# Altium PCB PCB5.PcbDoc
Units mil, origin at the board's own origin, x right, y up, seen from the top; angles counter-clockwise.
Board outline 1968.58 x 1968.74 mil, 4 copper layers (Top Layer, MidLayer1, MidLayer2, Bottom Layer); 65 components, 46 nets, 325 pads, 46 vias.
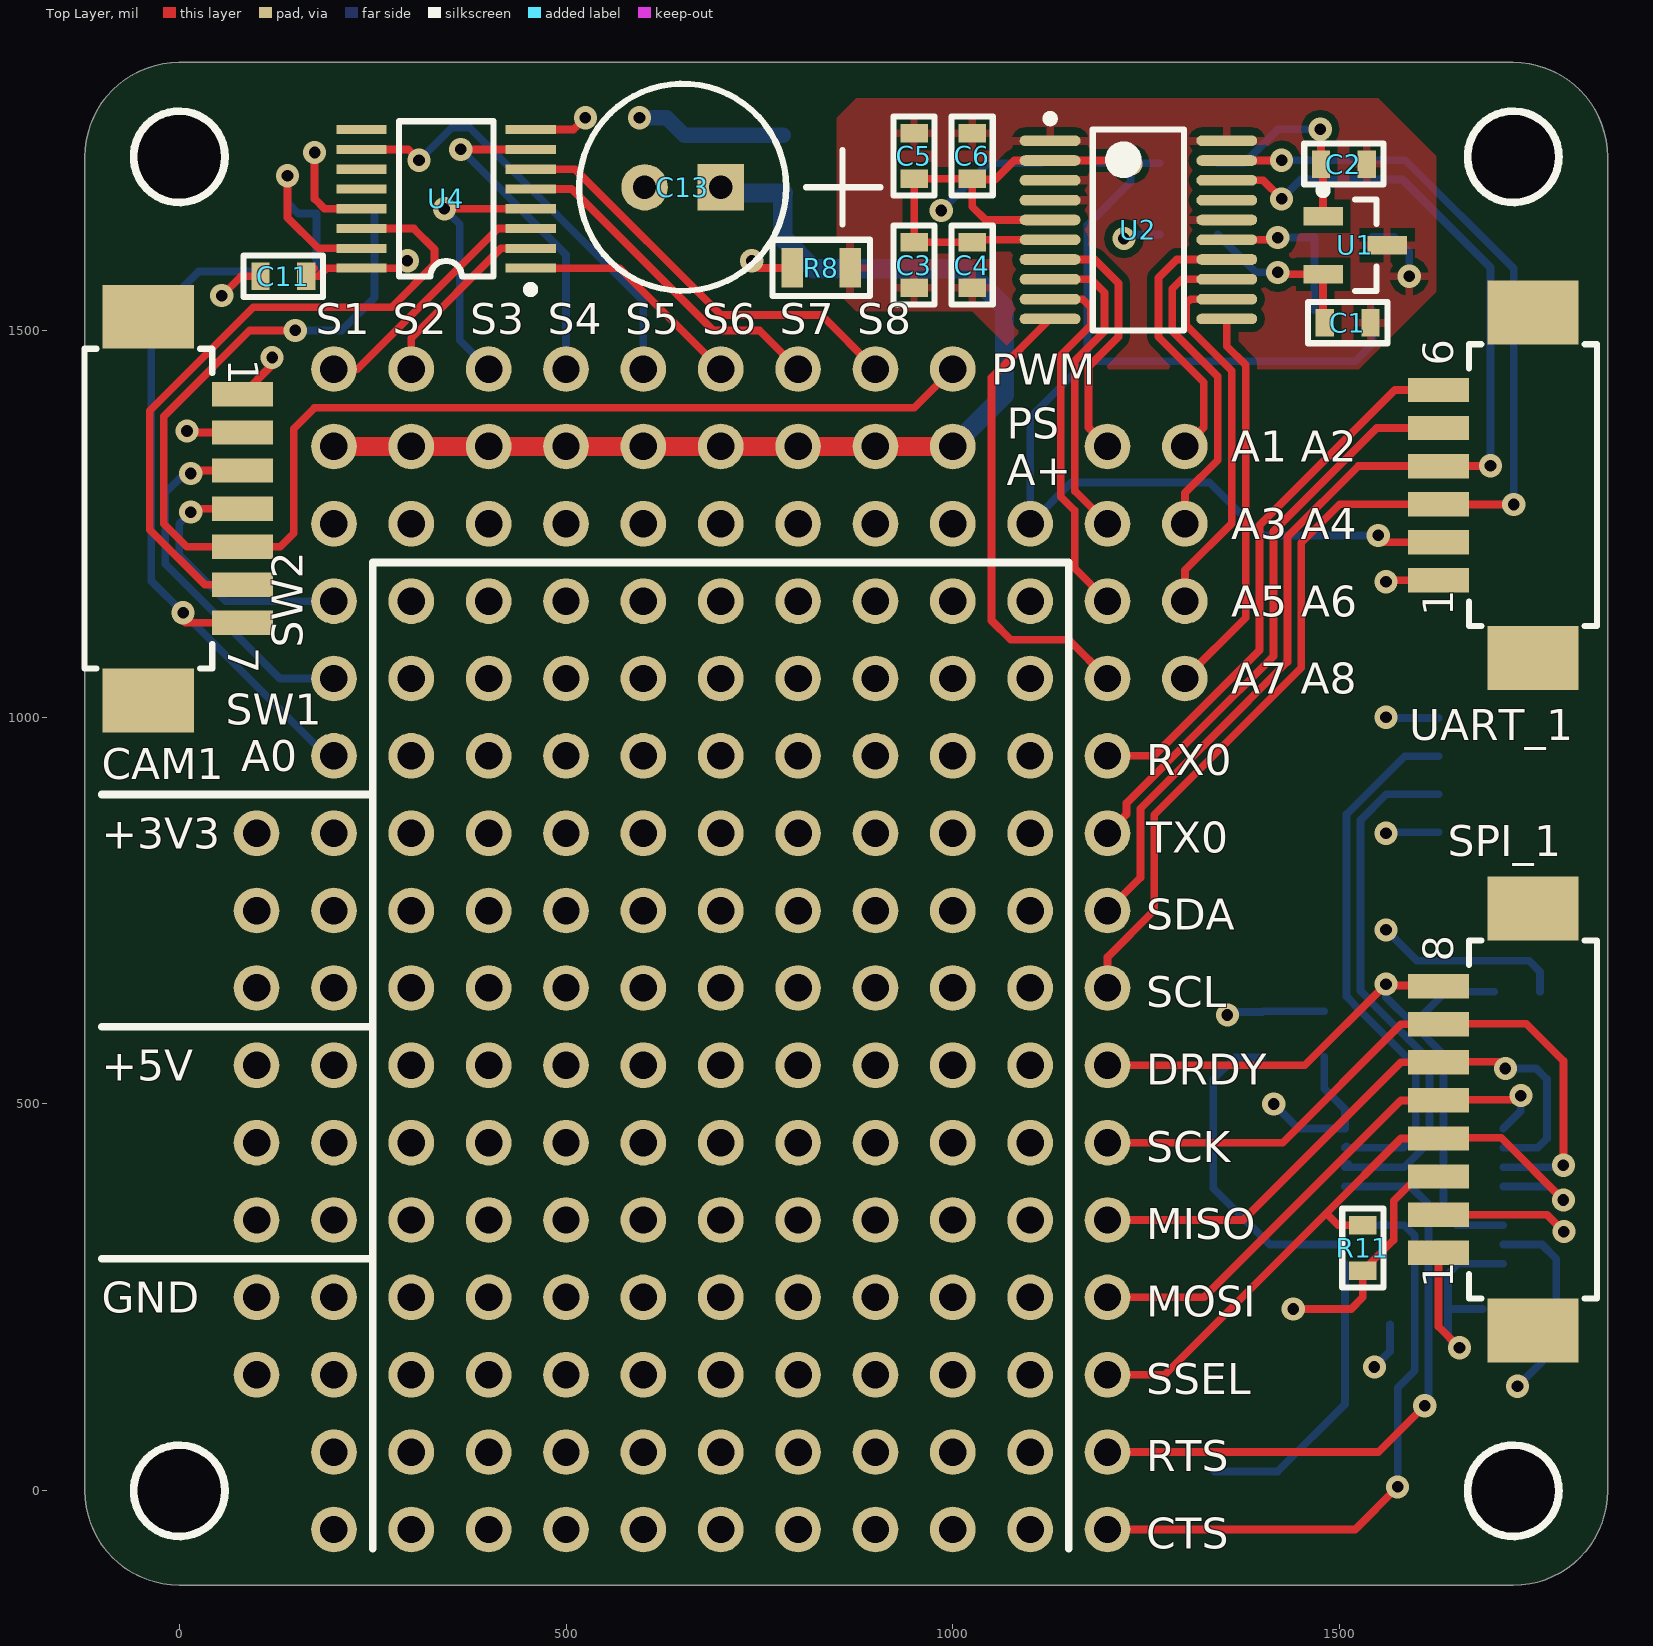
[diagram p0: Top Layer view]
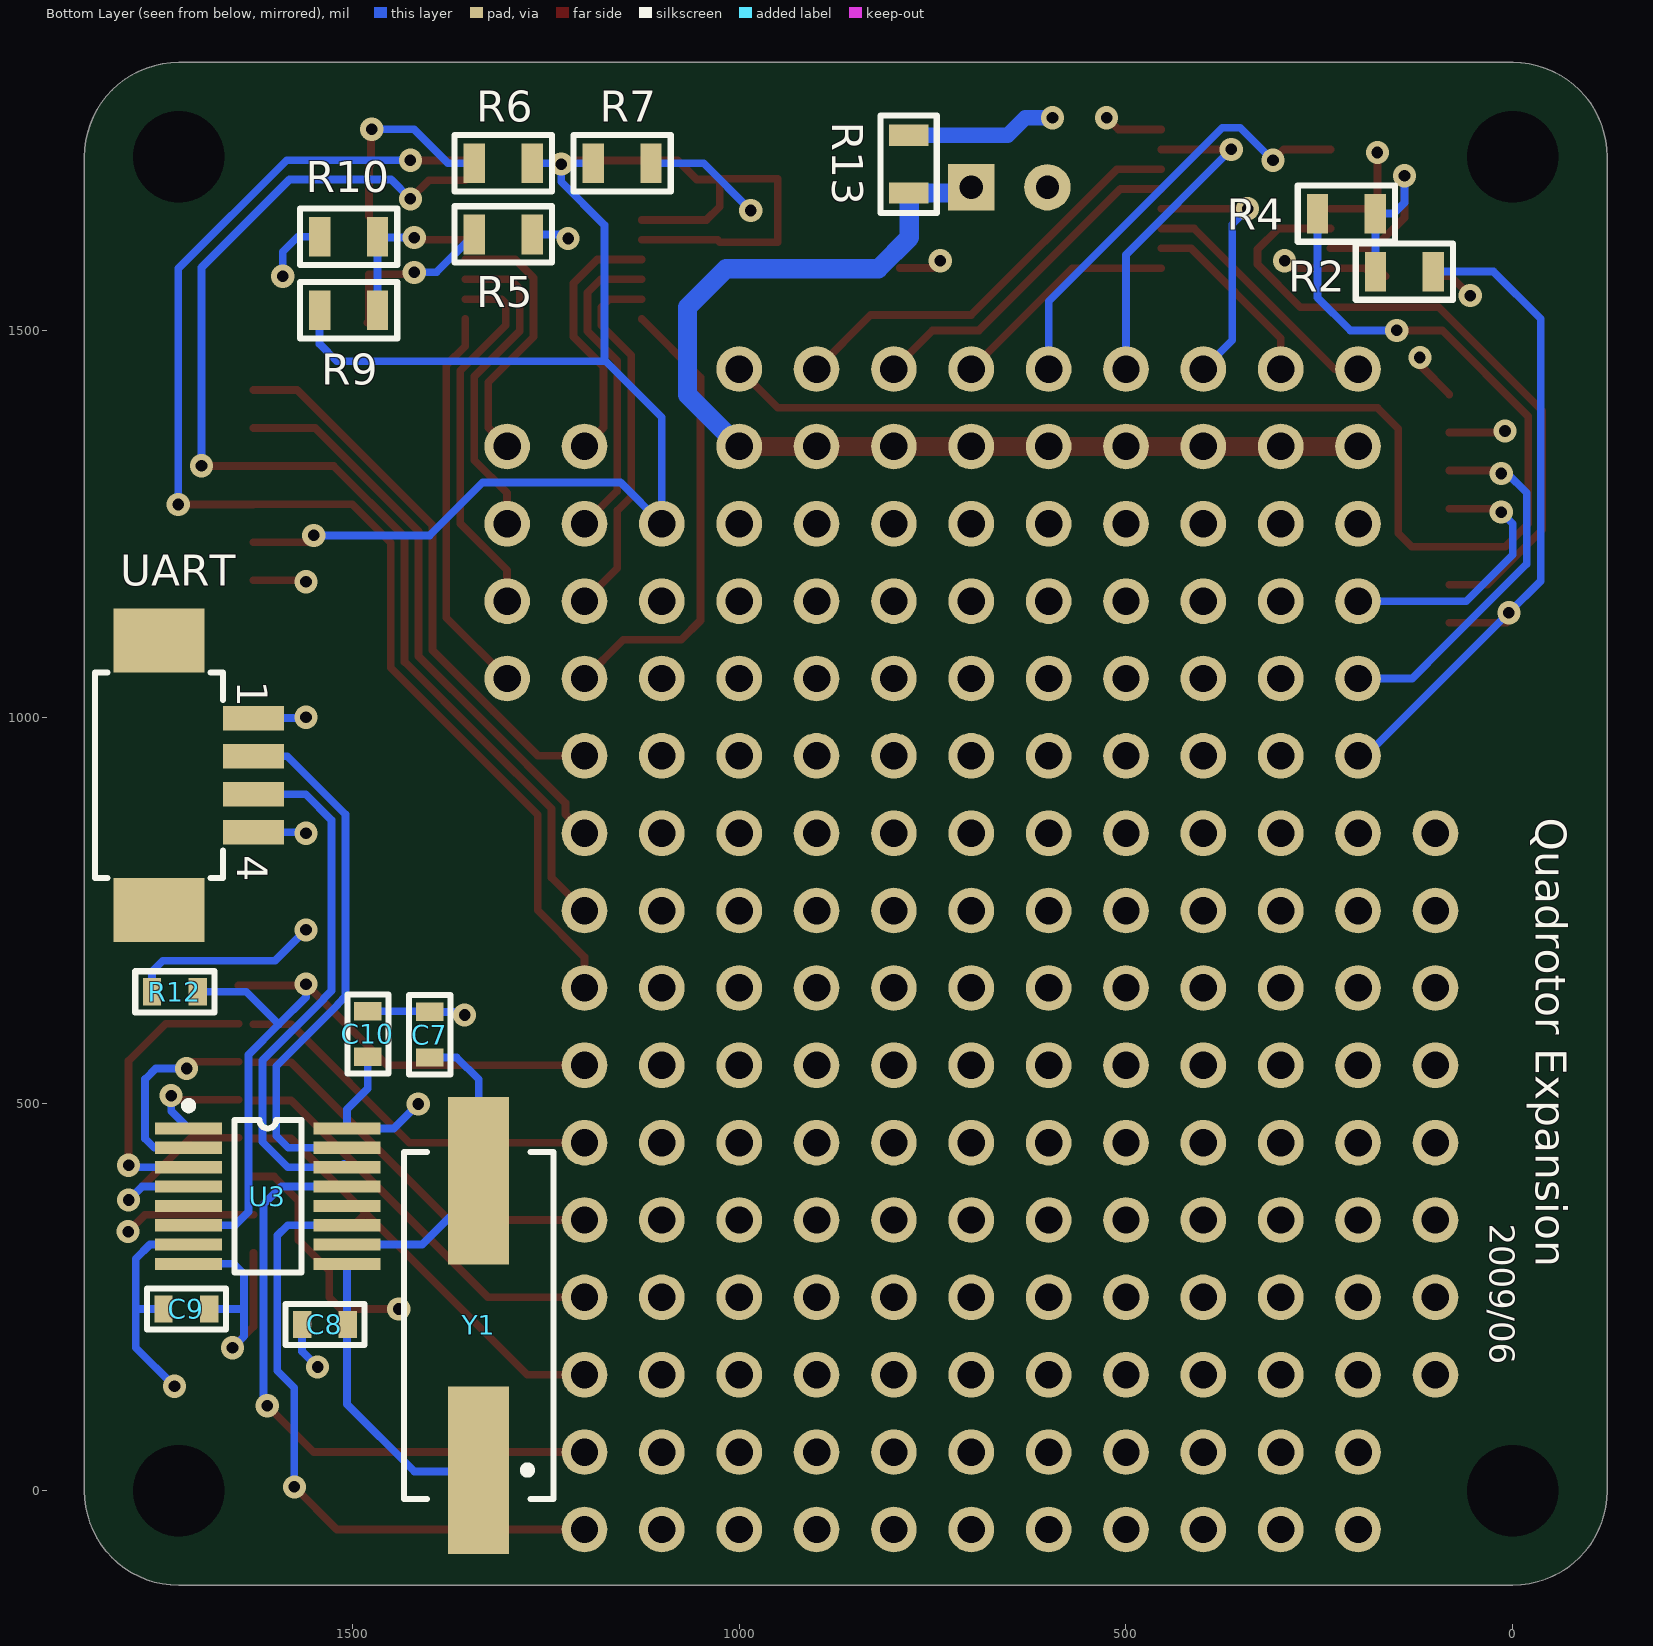
[diagram p1: Bottom Layer view, seen from below]
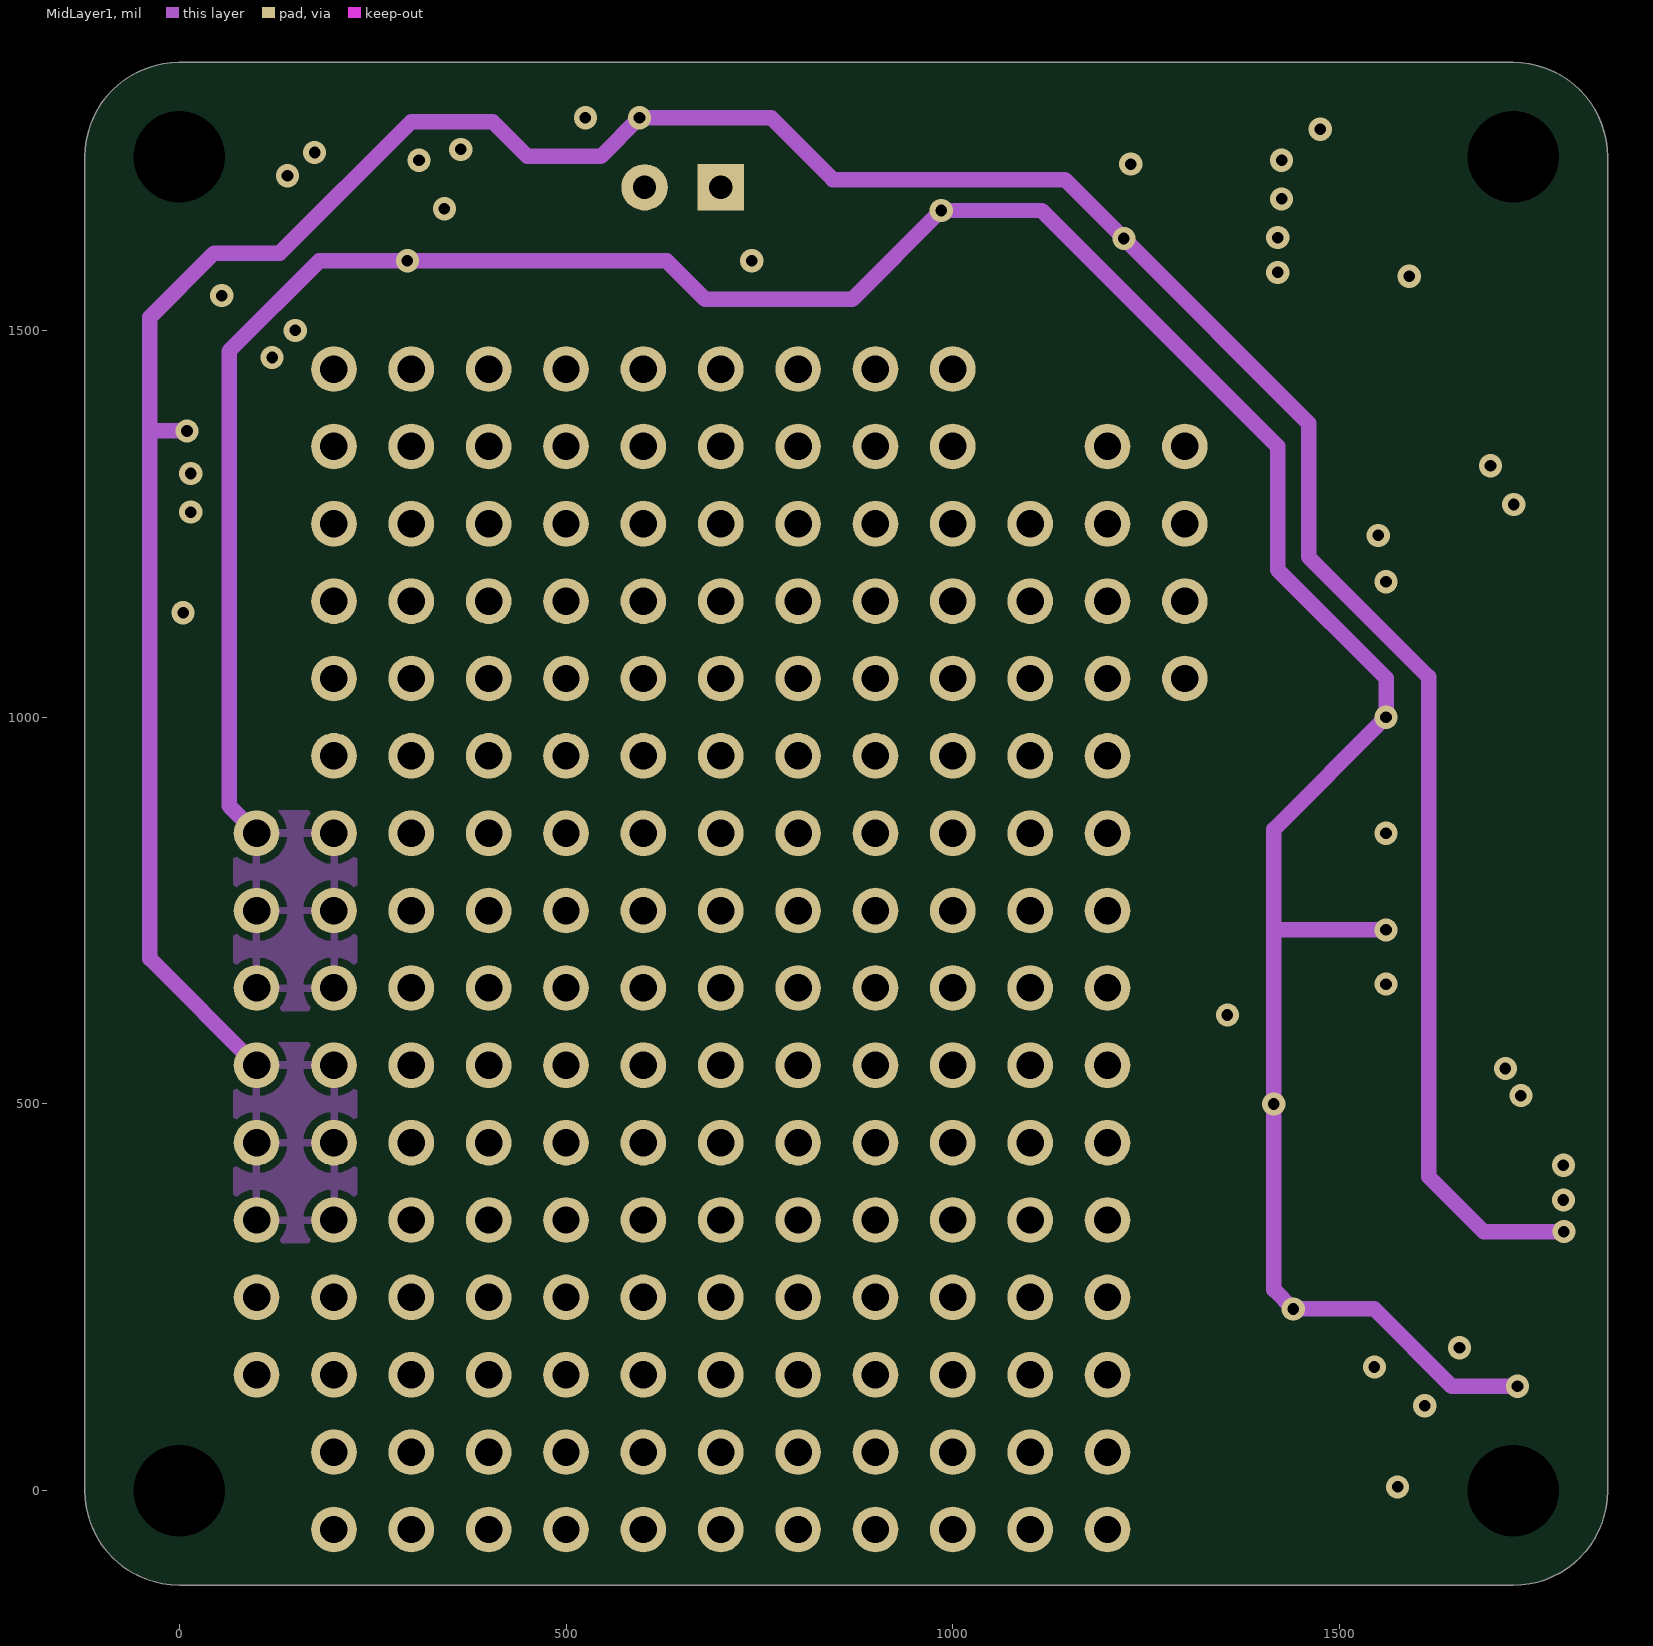
[diagram p2: MidLayer1]
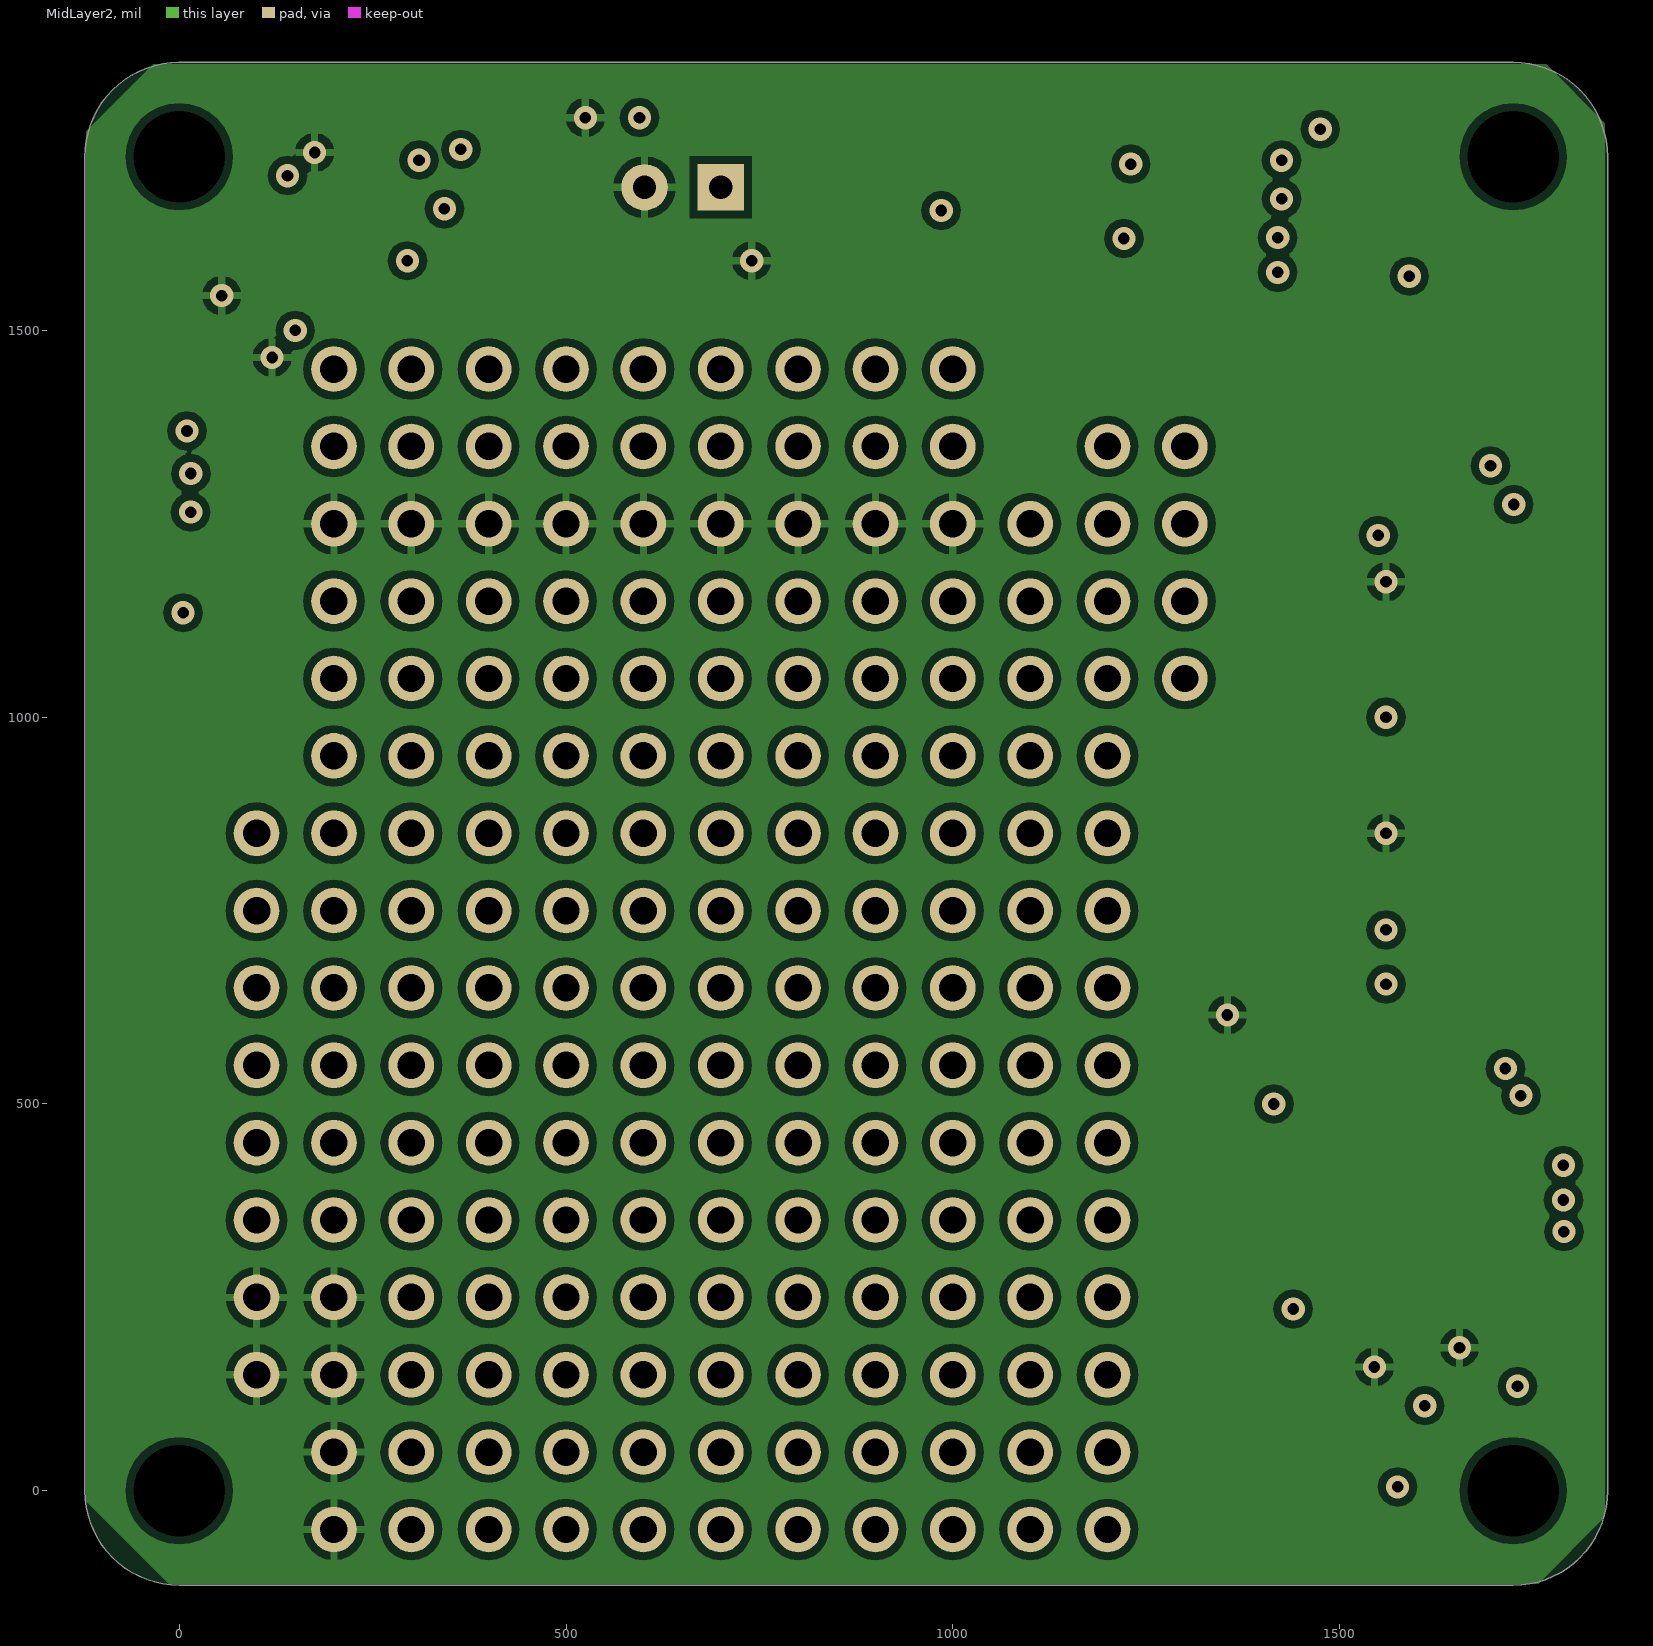
[diagram p3: MidLayer2]

## Layer stack, top to bottom
Top Layer: signal copper 1.4
Dielectric: core 12.6, FR-4, Dk 4.8
MidLayer1: signal copper 1.4
Dielectric: prepreg 12.6, FR-4, Dk 4.8
MidLayer2: signal copper 1.4
Dielectric: core 12.6, FR-4, Dk 4.8
Bottom Layer: signal copper 1.4

## Board outline
-122.05,0 ccw(c0,0) 0,-122.05 0.08,-121.97 1724.41,-121.97 1724.49,-122.2 ccw(c1724.41,-0.08) 1846.54,0 1846.54,1724.33 1846.46,1724.41 ccw(c1724.41,1724.41) 1724.41,1846.46 1724.41,1846.54 0.08,1846.54 0,1846.46 ccw(c0,1724.41) -122.05,1724.41

## Design rules (kind name [scope] priority, off if disabled: settings)
Clearance Clearance_2 [OnLayer(MidLayer1) vs (IsTrack)] p1: gap=20
Clearance Clearance_1 [InPoly] p2: gap=10
Clearance [All] p3: gap=8
ComponentClearance [All] p1 off: gap=10 collisioncheckmode=3 verticalgap=0 showdistances=TRUE
Height [All] p1: minheight=0 maxheight=10000 prefheight=500
HoleSize [All] p1: absolutevalues=TRUE maxlimit=196.85 minlimit=0.98 maxpercent=80.000 minpercent=20.000
MinimumSolderMaskSliver [All] p1 off: minsoldermaskwidth=10
PolygonConnect [All] p1: connectstyle=Relief reliefconductorwidth=10 reliefentries=4 polygonreliefangle="90 Angle"
RoutingVias [All] p1: holewidth=15 width=30 viastyle="Through Hole" minholewidth=15 minwidth=30 maxholewidth=30 maxwidth=50
SilkToSilkClearance [All] p1 off: silktosilkclearance=10
SilkscreenOverComponentPads [All] p1 off: minsilkscreentomaskgap=10
SolderMaskExpansion SolderMaskExpansion_1 [(IsVia)] p1: expansion=0
SolderMaskExpansion [Not (IsVia)] p2: expansion=4.02
TestPointUsage [All] p1: valid=0 allowmultiple=FALSE
Testpoint [All] p1: side=15 testpointundercomponent=TRUE minsize=40 maxsize=100 preferedsize=60 minholesize=0 maxholesize=40 preferedholesize=32 testpointgrid=1 style=1023 order=0-112345678
Width [All] p1: maxlimit=200 minlimit=6 preferedwidth=10 midlayer1_maxwidth=20 midlayer2_maxwidth=20 minimp=50.000000 maximp=50.000000 favimp=50.000000
18 further rules are at their usual default settings.

## Classes and differential pairs
component class ADC: A1 A2 A3 A4 A5 A6 A7 A8 A+ C1 C2 C3 C4 C5 C6 P7 P8 P9 P10 P11 P12 P13 P14 R5 R6 R7 R8 R9 R10 U1 U2
component class UART: C7 C8 C9 C10 CTS P15 R11 R12 RTS U3 UART Y1
component class SERVO: C11 C13 PS R13 S1 S2 S3 S4 S5 S6 S7 S8 U4
component class ExpansionMain: A0 CAM CAM1 DRDY MISO MOSI P1 P2 P3 PWM R2 R4 RX0 SCK SCL SDA SPI_0 SPI_1 SSEL SW1 SW2 TX0 UART_0 UART_1

## Components (designator, comment, footprint, x,y, rotation, side; value= is the part's Value field where it differs from the comment)
A0 "" PAD_ROUND 200,950 r0 top
A1 "" PAD_ROUND 1200,1350 r90 top
A2 "" PAD_ROUND 1300,1350 r90 top
A3 "" PAD_ROUND 1200,1250 r90 top
A4 "" PAD_ROUND 1300,1250 r0 top
A5 "" PAD_ROUND 1200,1150 r90 top
A6 "" PAD_ROUND 1300,1150 r0 top
A7 "" PAD_ROUND 1200,1050 r0 top
A8 "" PAD_ROUND 1300,1050 r0 top
A+ "" PAD_ROUND 1100,1250 r0 top
C1 "100nF" 0603 1540,1510 r180 top
C2 "100nF" 0603 1535,1715 r180 top
C3 "1uF" 0603 950,1555 r90 top
C4 "100nF" 0603 1025,1555 r90 top
C5 "100nF" 0603 950,1755 r270 top
C6 "100nF" 0603 1025,1755 r270 top
C7 "Cap" 0603 1400,560 r90 bottom
C8 "Cap" 0603 1565,215 r180 bottom
C9 "100nF" 0603 1685,235 r0 bottom
C10 "100nF" 0603 1480,620 r270 bottom
C11 "100nF" 0603 105,1570 r0 top
C13 "CP_POL_100uF_25V_6.3mm" CAP_ELECTRO_6.3x11 700,1685 r180 top
CAM1 "7 Pin Header" CONN_7X1_SMT_RA_1.25MM -40,1245 r270 top
CTS "" PAD_ROUND 1200,-50 r90 top
DRDY "" PAD_ROUND 1200,550 r90 top
MISO "" PAD_ROUND 1200,350 r90 top
MOSI "" PAD_ROUND 1200,250 r90 top
PS "" PAD_ROUND 1000,1350 r90 top
PWM "" PAD_ROUND 1000,1450 r90 top
R2 "0R0" 0805 140,1575 r0 bottom
R4 "0R0" 0805 215,1650 r0 bottom
R5 "0R0" 0805 1305,1625 r180 bottom
R6 "0R0" 0805 1305,1715 r0 bottom
R7 "0R0" 0805 1151.42,1715 r0 bottom
R8 "0R0" 0805 830,1579.76 r180 top
R9 "0R0" 0805 1505,1525 r0 bottom
R10 "0R0" 0805 1505,1620 r0 bottom
R11 "100k" 0603 1530,343.33 r270 top
R12 "100k" 0603 1700,645 r0 bottom
R13 "0R0" 0805 780,1715 r270 bottom
RTS "" PAD_ROUND 1200,50 r90 top
RX0 "" PAD_ROUND 1200,950 r0 top
S1 "3 Pin Header" G_HDR1X3_RND_PIN1_NO_OVERLAY 200,1450 r270 top
S2 "3 Pin Header" G_HDR1X3_RND_PIN1_NO_OVERLAY 300,1450 r270 top
S3 "3 Pin Header" G_HDR1X3_RND_PIN1_NO_OVERLAY 400,1450 r270 top
S4 "3 Pin Header" G_HDR1X3_RND_PIN1_NO_OVERLAY 500,1450 r270 top
S5 "3 Pin Header" G_HDR1X3_RND_PIN1_NO_OVERLAY 600,1450 r270 top
S6 "3 Pin Header" G_HDR1X3_RND_PIN1_NO_OVERLAY 700,1450 r270 top
S7 "3 Pin Header" G_HDR1X3_RND_PIN1_NO_OVERLAY 800,1450 r270 top
S8 "3 Pin Header" G_HDR1X3_RND_PIN1_NO_OVERLAY 900,1450 r270 top
SCK "" PAD_ROUND 1200,450 r0 top
SCL "Value" PAD_ROUND 1200,650 r90 top
SDA "" PAD_ROUND 1200,750 r90 top
SPI_1 "8 Pin Header" CONN_8X1_SMT_RA_1.25MM 1750,480 r90 top
SSEL "" PAD_ROUND 1200,150 r90 top
SW1 "" PAD_ROUND 200,1050 r0 top
SW2 "" PAD_ROUND 200,1150 r0 top
TX0 "" PAD_ROUND 1200,850 r0 top
U1 "LM3480IM3-3.3" MF03A_N 1520,1610 r0 top
U2 "AD7997" TSOP65P640-20AM 1240,1630 r0 top
U3 "MAX3100CEE+" QSOP16_MAX3100 1609.33,380.83 r270 bottom
U4 "CD4017BCM" PW016 345,1670 r90 top
UART "4 Pin Header" CONN_4X1_SMT_RA_1.25MM 1750,925 r270 bottom
UART_1 "6 Pin Header" CONN_6X1_SMT_RA_1.25MM 1750,1300 r90 top
Y1 "3.6864MHz" HC49/4h_SMX 1336.73,212.8 r90 bottom

## Footprints (in the part's own frame and the unit in brackets; to place one, negate y for a bottom-side part, rotate by r counter-clockwise, add the part's x,y. Pads: shape width x height; smd on the part's side, far side on the other; paste and mask are expansions set on the pad)
0603 [mm] "Non polarized 0603 footprint"
  rect 0.6x0.9 smd: 1(0,0) 2(1.5,0)
  silkscreen extent -0.55,-0.67 2.05,0.67
0805 [mm]
  rect 0.7x1.3 smd: 1(-0.95,-0.025) 2(0.95,-0.025)
  silkscreen extent -1.6,-0.95 1.6,0.9
CAP_ELECTRO_6.3x11 [mil] "Electrolytic Capacitor D=6.3, L=11 (Minature Aluminium YXF)"
  rect 60x60 hole 30: 1(0,0)
  round 60 hole 30: 2(98.43,0)
  silkscreen extent -207,-134 183,134
CONN_4X1_SMT_RA_1.25MM [mm] "PicoBlade 5326 Series Header"
  rect 0.8x2 smd: 1(-1.875,3.1) 2(-0.625,3.1) 3(0.625,3.1) 4(1.875,3.1)
  rect 2.1x3 smd: " "(4.425,0) ""(-4.425,0)
  silkscreen extent -3.37,-2.1 3.37,2.1
CONN_6X1_SMT_RA_1.25MM [mm] "PicoBlade 5326 Series Header"
  rect 0.8x2 smd: 1(-3.125,3.1) 2(-1.875,3.1) 3(-0.625,3.1) 4(0.625,3.1) 5(1.875,3.1) 6(3.125,3.1)
  rect 2.1x3 smd: " "(5.675,0) ""(-5.675,0)
  silkscreen extent -4.62,-2.1 4.62,2.1
CONN_7X1_SMT_RA_1.25MM [mm] "PicoBlade 5326 Series Header"
  rect 0.8x2 smd: 1(-4.375,3.1) 2(-3.125,3.1) 3(-1.875,3.1) 4(-0.625,3.1) 5(0.625,3.1) 6(1.875,3.1) 7(3.125,3.1)
  rect 2.1x3 smd: " "(5.675,0) ""(-6.925,0)
  silkscreen extent -5.87,-2.1 4.62,2.1
CONN_8X1_SMT_RA_1.25MM [mm] "PicoBlade 5326 Series Header"
  rect 0.8x2 smd: 1(-4.375,3.1) 2(-3.125,3.1) 3(-1.875,3.1) 4(-0.625,3.1) 5(0.625,3.1) 6(1.875,3.1) 7(3.125,3.1) 8(4.375,3.1)
  rect 2.1x3 smd: " "(6.925,0) ""(-6.925,0)
  silkscreen extent -5.87,-2.1 5.87,2.1
G_HDR1X3_RND_PIN1_NO_OVERLAY [mm] "Connector; Header; 3 Position, Round Pin 1 (Not Square)"
  round 1.5 hole 0.9: 1(0,0) 2(2.54,0) 3(5.08,0)
HC49/4h_SMX [mm] "Quartz Crystal, SM; Body 13.4 (inc. leads) x 4.9 mm (LxW max)"
  rect 5.5x2 smd: 1(-4.725,0) 2(4.775,0)
  silkscreen extent -5.67,-2.45 5.72,2.45
MF03A_N [mm] "SOT23, 3-Leads, Body 2.9x1.3mm, Pitch 0.95mm, Lead Span 2.4mm, IPC Medium Density"
  rect 1.3x0.6 smd: 1(-1.05,0.95) 2(-1.05,-0.95) 3(1.05,0)
  silkscreen extent -1.17,-1.5 0.7,1.92, body extent -0.7,-1.5 0.7,1.5, height 1.12
PAD_ROUND [mm]
  round 1.5 hole 0.9: 1(0,0)
PW016 [mm] "Shrink Small Outline; 16 Leads; Body Width 4.4 mm; Pitch 0.65 mm"
  rect 0.3x1.65 smd: 1(-2.275,-2.775) 2(-1.625,-2.775) 3(-0.975,-2.775) 4(-0.325,-2.775) 5(0.325,-2.775) 6(0.975,-2.775) 7(1.625,-2.775) 8(2.275,-2.775) 9(2.275,2.775) 10(1.625,2.775) 11(0.975,2.775) 12(0.325,2.775) 13(-0.325,2.775) 14(-0.975,2.775) 15(-1.625,2.775) 16(-2.275,2.775)
  silkscreen extent -3.1,-2.9 2.55,1.55
QSOP16_MAX3100 [mm] "SSOP; 16 Leads; Body Width 3.9 mm; Pitch 0.635 mm"
  rect 0.4x2.2 smd: 1(-2.223,-2.6) 2(-1.588,-2.6) 3(-0.953,-2.6) 4(-0.318,-2.6) 5(0.317,-2.6) 6(0.952,-2.6) 7(1.587,-2.6) 8(2.222,-2.6) 9(2.223,2.6) 10(1.588,2.6) 11(0.953,2.6) 12(0.318,2.6) 13(-0.317,2.6) 14(-0.952,2.6) 15(-1.587,2.6) 16(-2.222,2.6)
  silkscreen extent -3.1,-2.73 2.5,1.1
TSOP65P640-20AM [mm] "TSOP, 20-Leads, Body 6.5x4.4mm, Pitch 0.65mm, IPC Low Density"
  oval 2x0.35 smd: 1(-2.9,2.925) 2(-2.9,2.275) 3(-2.9,1.625) 4(-2.9,0.975) 5(-2.9,0.325) 6(-2.9,-0.325) 7(-2.9,-0.975) 8(-2.9,-1.625) 9(-2.9,-2.275) 10(-2.9,-2.925) 11(2.9,-2.925) 12(2.9,-2.275) 13(2.9,-1.625) 14(2.9,-0.975) 15(2.9,-0.325) 16(2.9,0.325) 17(2.9,0.975) 18(2.9,1.625) 19(2.9,2.275) 20(2.9,2.925)
  silkscreen extent -3.02,-3.3 1.5,3.77, body extent -2.25,-3.3 2.25,3.3, height 1.1

## Part data
A0 A1 A2 A3 A4 A5 A6 A7 A8 A+ CTS DRDY MISO MOSI PS PWM RTS RX0 SCK SCL SDA SSEL SW1 SW2 TX0: library part JP_pad, "Pad"
C1 C2 C4 C5 C6 C9 C10 C11: library part "CP_100nF 0603", "CAP CER .10UF 50V X5R 0603"
C3: library part "CP_1uF 0603", "CAP CER 1.0UF 50V X5S 0603"
C7 C8: "Capacitor"
C13: "Polarized Capacitor (Radial)"
CAM1: library part "JP_7PIN HDR_SMT_RA_MOLEX", "CONN HDR VERT 7POS .100\" SNGL"
R2 R4 R9 R10: library part "RS_0R0 0603", "RES 0.0 OHM 1/10W 5% 0603 SMD"
R5 R6 R7 R8 R13: library part "RS_0R0 0603", "RES 0.0 OHM 1/10W 5% 1206 SMD"
R11 R12: library part "RS_100k 0603", "RES 100K OHM 1/10W 1% 0603 SMD"
S1 S2 S3 S4 S5 S6 S7 S8: library part "JP_3PIN HDR", "CONN HDR VERT 3POS .100\" SNGL"
SPI_1: library part "JP_8PIN HDR_SMT_RA_MOLEX", "CONN HDR VERT 12POS .100\" SNGL"
U1: "100 mA, SOT-23, Quasi Low-Dropout Linear Voltage Regulator"
U2: library part IC_AD7997, "10-bit 8 channel ADC"
U3: library part IC_MAX3100, "SPI UART"
U4: "Decade Counter/Divider with 10 Decoded Outputs"
UART: library part "JP_4PIN HDR_SMT_RA_MOLEX_1", "CONN HDR VERT 4POS .100\" SNGL"
UART_1: library part "JP_6PIN HDR_SMT_RA_MOLEX", "CONN HDR VERT 6POS .100\" SNGL"
Y1: library part XTAL, "Crystal Oscillator"

## Free pads (board coordinates)
  round 0 hole 118.11: ""(0,0) ""(0,1724.41) ""(1724.41,0) ""(1724.41,1724.41)
  round 59.06 hole 35.43: ""(100,150) ""(100,250) ""(100,350) ""(100,450) ""(100,550) ""(100,650) ""(100,750) ""(100,850) ""(200,-50) ""(200,50) ""(200,150) ""(200,250) ""(200,350) ""(200,450) ""(200,550) ""(200,650) ""(200,750) ""(200,850) ""(300,-50) ""(300,50) ""(300,150) ""(300,250) ""(300,350) ""(300,450) ""(300,550) ""(300,650) ""(300,750) ""(300,850) ""(300,950) ""(300,1050) ""(300,1150) ""(400,-50) ""(400,50) ""(400,150) ""(400,250) ""(400,350) ""(400,450) ""(400,550) ""(400,650) ""(400,750) ""(400,850) ""(400,950) ""(400,1050) ""(400,1150) ""(500,-50) ""(500,50) ""(500,150) ""(500,250) ""(500,350) ""(500,450) ""(500,550) ""(500,650) ""(500,750) ""(500,850) ""(500,950) ""(500,1050) ""(500,1150) ""(600,-50) ""(600,50) ""(600,150) ""(600,250) ""(600,350) ""(600,450) ""(600,550) ""(600,650) ""(600,750) ""(600,850) ""(600,950) ""(600,1050) ""(600,1150) ""(700,-50) ""(700,50) ""(700,150) ""(700,250) ""(700,350) ""(700,450) ""(700,550) ""(700,650) ""(700,750) ""(700,850) ""(700,950) ""(700,1050) ""(700,1150) ""(800,-50) ""(800,50) ""(800,150) ""(800,250) ""(800,350) ""(800,450) ""(800,550) ""(800,650) ""(800,750) ""(800,850) ""(800,950) ""(800,1050) ""(800,1150) ""(900,-50) ""(900,50) ""(900,150) ""(900,250) ""(900,350) ""(900,450) ""(900,550) ""(900,650) ""(900,750) ""(900,850) ""(900,950) ""(900,1050) ""(900,1150) ""(1000,-50) ""(1000,50) ""(1000,150) ""(1000,250) ""(1000,350) ""(1000,450) ""(1000,550) ""(1000,650) ""(1000,750) ""(1000,850) ""(1000,950) ""(1000,1050) ""(1000,1150) ""(1000,1250) ""(1100,-50) ""(1100,50) ""(1100,150) ""(1100,250) ""(1100,350) ""(1100,450) ""(1100,550) ""(1100,650) ""(1100,750) ""(1100,850) ""(1100,950) ""(1100,1050) ""(1100,1150)

## Via types
v1: diameter 30, hole 15, Top Layer to Bottom Layer, 46 vias

## Nets (pads, with @x,y where several pads share a name; then routed paths per layer and width w, separated by ;. In a path a pad name is that pad's centre, name@x,y a point inside that pad or via, vN(x,y) a via of type N, cw(c..) or ccw(c..) an arc to the next point about the centre after c; other vN are vias at no path point)
+3V3: C9.2 C10.2 C11.2 pad.@100,650 pad.@100,750 pad.@100,850 pad.@200,650 pad.@200,750 pad.@200,850 R7.1 R11.2 R12.2 SPI_1.3 U3.7 U3.16 U4.16 UART.1 | length 5396.1
  Top Layer w10: C11.2@174.49,1580.43 C11.2 180,1570 190.43,1580.43 U4.16 285.43,1580.43 v1(295,1590) ; v1(1440,235) 1515,235 1530,250 R11.2 1570,324.27 1570,375 1601.18,406.18 SPI_1.3
  MidLayer1 w20: 65,965 64.53,965.47 ; pad.@100,850 64.53,885.47 64.53,965.47 ; v1(1560,725) 1415,725 ; v1(1730,135) 1645,135 1545,235 v1(1440,235) 1415,260 v1(1415,500) 1415,725 ; 64.53,965.47 64.53,1473.23 181.3,1590 v1(295,1590) 630,1590 680,1540 870,1540 v1(985,1655) 1115,1655 1420,1350 1420,1190.53 1560,1050.53 v1(1560,1000) 1415,855 1415,725
  Bottom Layer w10: v1(985,1655) 1045.98,1715.98 R7.1 ; v1(1415,500) 1446.67,468.33 U3.16 1506.97,493.03 1480,520 C10.2 ; v1(1560,725) 1600,685 1745,685 1759.06,670.94 R12.2 ; v1(1560,1000) 1561.18,998.82 UART.1 ; U3.7 1761.67,318.33 1780,300 1780,235 ; v1(1730,135) 1780,185 1780,235 ; C9.2 1780,235
+5V: CAM1.2 pad.@100,350 pad.@100,450 pad.@100,550 pad.@200,350 pad.@200,450 pad.@200,550 R5.2 R13.1 SPI_1.2 | length 4600.9
  Top Layer w10: v1(10,1370) 11.97,1368.03 CAM1.2 ; SPI_1.2 1768.03,356.97 v1(1790,335)
  MidLayer1 w20: v1(10,1370) -38,1370 ; pad.@100,550 -38,688 -38,1370 ; v1(1790,335) 1686.18,335 1615,406.18 1615,1052.1 1460,1207.1 1460,1380 v1(1221.21,1618.79) 1145,1695 845,1695 765,1775 v1(595,1775) 545,1725 450,1725 405,1770 300,1770 130,1600 45,1600 -38,1517 -38,1370
  Bottom Layer w10: v1@1226.44,1624.02 R5.2
  Bottom Layer w20: v1(595,1775) 630,1775 652.6,1752.4 R13.1
+5V_SERVO: C13.1 PS.1 R13.2 S1.2 S2.2 S3.2 S4.2 S5.2 S6.2 S7.2 S8.2 | length 1465.8
  Top Layer w25: S1.2 S2.2 S3.2 S4.2 S5.2 S6.2 S7.2 S8.2 PS.1
  Bottom Layer w25: C13.1 707.4,1677.6 R13.2 ; R13.2@780,1670 780,1620 820.24,1579.76 1017.01,1579.76 1066.77,1530 1066.77,1416.77 PS.1
ADC1: A1.1 U2.7 | length 338.1
  Top Layer w10: U2.7 1183.39,1591.61 1214.2,1560.8 1214.2,1491.69 1175.47,1452.97 1175.47,1374.53 A1.1
ADC2: A2.1 U2.14 | length 350.5
  Top Layer w10: A2.1 1324.53,1374.53 1324.53,1432.97 1265.8,1491.69 1265.8,1567.78 1289.64,1591.61 U2.14
ADC3: A3.1 U2.8 | length 410
  Top Layer w10: U2.8 1178.98,1566.02 1196.2,1548.8 1196.2,1499.15 1157.47,1460.42 1157.47,1292.53 A3.1
ADC4: A4.1 U2.13 | length 421.2
  Top Layer w10: A4.1 1300,1289.86 1342.53,1332.38 1342.53,1440.42 1321.48,1461.48 1283.8,1499.15 1283.8,1553.8 1296.02,1566.02 U2.13
ADC5: A5.1 U2.9 | length 477.8
  Top Layer w10: U2.9 1167.76,1540.43 1178.2,1530 1178.2,1506.6 1139.47,1467.88 1139.47,1285.07 1157.47,1267.07 1157.47,1192.53 A5.1
ADC6: A6.1 U2.12 | length 489
  Top Layer w10: A6.1 1300,1189.86 1360.53,1250.38 1360.53,1447.88 1301.8,1506.6 1301.8,1535 1307.24,1540.43 U2.12
ADC7: A7.1 U2.10 | length 602.3
  Top Layer w10: U2.10 1050,1439.02 1050,1125 1075,1100 1150,1100 A7.1
ADC8: A8.1 U2.11 | length 507.5
  Top Layer w10: A8.1 1378.53,1128.53 1378.53,1455.34 1354.17,1479.69 U2.11
ADC_SPARE: A0.1 CAM1.7 R2.1 | length 924.6
  Top Layer w10: v1(5,1135) 0.59,1130.59 0.59,1129.17 7.8,1121.97 CAM1.7
  Bottom Layer w10: R2.1 24.98,1575.98 -36,1515 -36,1176 v1(5,1135) 190,950 A0.1
AGND: C1.1 C2.1 C3.1 C4.1 C5.1 C6.1 R8.1 R10.2 U1.3 U2.1 U2.3 U2.4 U2.16 U2.20 | length 87.2
  Bottom Layer w10: R10.2 1570.59,1620.98 1590,1601.57 v1(1590,1570)
AVCC: A+.1 C3.2 C4.2 C5.2 C6.2 R6.1 R7.2 R9.2 U2.2 U2.5 U2.6 UART_1.2 | length 2297
  Top Layer w10: U2.6 1028.15,1617.2 C4.2 C3.2 C5.2 C6.2 ; U2.5 1042.2,1642.8 1025,1660 C6.2 ; v1(1230,1715) 1225.43,1719.57 U2.2 1079.57,1719.57 1055,1695 1025.94,1695 C6.2 ; v1(1550,1235) 1558.82,1226.18 UART_1.2
  Bottom Layer w10: R7.2 v1@1229.02,1715.98 ; v1(1230,1715) 1230,1691.99 1174.22,1636.21 1174.22,1461.74 1172.47,1460 ; v1@1230,1715.98 R6.1 ; R9.2 1542.4,1482.4 1520,1460 1172.47,1460 ; v1(1550,1235) 1400.06,1235 1331.56,1303.5 1153.5,1303.5 A+.1 1100,1387.53 1172.47,1460
CTS: CTS.1 U3.11 | length 827.4
  Top Layer w10: CTS.1 1520,-50 v1(1575,5)
  Bottom Layer w10: U3.11 1583.67,343.33 1597,330 1597,155 1575,133 v1(1575,5)
DRDY_0: DRDY.1 R12.1 SPI_1.8 U3.6 | length 1021.8
  Top Layer w10: DRDY.1 1455,550 1558.07,653.07 SPI_1.8@1647.28,653.07
  Bottom Layer w10: v1(1560,655) 1560,638.03 1595.2,602.83 ; R12.1 1637.37,645 1595.2,602.83 ; U3.6 1651.83,343.33 1634.33,360.83 1634.33,563.7 1595.2,602.83
GND: C7.2 C8.1 C9.1 C10.1 C11.1 C13.2 CAM1.1 pad.@100,150 pad.@100,250 pad.@200,50 pad.@200,150 pad.@200,250 pad.@200,-50 pad.@1000,1250 R8.2 S1.3 S2.3 S3.3 S4.3 S5.3 S6.3 S7.3 S8.3 SPI_1.1 U3.8 U4.8 U4.13 UART.4 UART_1.1 | length 1068.4
  Top Layer w10: v1(55,1545) 80,1570 C11.1 ; CAM1.1 120,1455.2 v1(120,1465) ; v1(175,1730) 175,1670 187.8,1657.2 U4.13 ; U4.8 509.57,1759.57 v1(525,1775) ; v1(740,1590) 749.25,1580.75 R8.2 ; v1(1560,1175) 1561.97,1176.97 UART_1.1 ; SPI_1.1 1627.95,212.05 v1(1655,185)
  Bottom Layer w10: v1(1355,615) 1359.06,619.06 C7.2 1400.94,620 C10.1 ; v1(1545,160) 1565,180 C8.1 ; v1(1560,850) 1561.18,851.18 UART.4 ; v1(1655,185) 1640,200 1640,235 ; C9.1 1640,235 ; U3.8 1653.33,293.33 1640,280 1640,235
I2C1_SCL: SCL.1 U2.19 UART_1.3 | length 1708.6
  Top Layer w10: SCL.1 1200,689.86 1260.53,750.38 1260.53,874.02 1450.53,1064.02 1450.53,1225.53 1500.39,1275.39 UART_1.3 1628.35,1275 v1(1725,1275) ; U2.19 1424.57,1719.57 v1(1425,1720)
  Bottom Layer w10: v1(1425,1720) 1585,1720 1725,1580 v1(1725,1275)
I2C1_SDA: SDA.1 U2.18 UART_1.4 | length 1544.4
  Top Layer w10: SDA.1 1242.53,792.53 1242.53,881.47 1332.53,971.47 1432.53,1071.47 1432.53,1232.98 1524.15,1324.61 UART_1.4 1694.61,1324.61 v1(1695,1325) ; U2.18 1401.02,1693.98 v1(1425,1670)
  Bottom Layer w10: v1(1425,1670) 1450,1695 1581.37,1695 1695,1581.37 v1(1695,1325)
MATCH0: CAM1.6 U4.14 | length 874.5
  Top Layer w10: CAM1.6 33.36,1171.18 -38,1242.54 -38,1396.16 95.84,1530 274.6,1530 330,1585.4 330,1605 303.39,1631.61 U4.14
MISO_0: MISO.1 SPI_1.6 U3.2 | length 822.4
  Top Layer w10: MISO.1 1375.51,350 1579.33,553.82 SPI_1.6 ; SPI_1.6@1647.28,554.65 1705.51,554.65 v1(1714.33,545.83)
  Bottom Layer w10: v1(1714.33,545.83) 1754.33,545.83 1768,532.16 1768,455.07 1756.26,443.33 U3.2 U3.2@1753.43,443.33
MOSI_0: MOSI.1 SPI_1.5 U3.1 | length 674.6
  Top Layer w10: MOSI.1 1324.72,250 1579.33,504.61 SPI_1.5 ; SPI_1.5@1647.28,505.43 1728.94,505.43 v1(1734.33,510.83)
  Bottom Layer w10: U3.1 1734.33,490.96 v1(1734.33,510.83)
NetC1_2: C1.2 R5.1 U1.2 | length 221.1
  Top Layer w10: v1(1420,1575) 1422.4,1572.6 U1.2 1478.66,1512.28 C1.2
  Bottom Layer w10: R5.1 1391.42,1575 v1(1420,1575)
NetC2_2: C2.2 R6.2 U1.1 | length 264.9
  Top Layer w10: v1(1475,1760) 1475.94,1759.06 C2.2 1478.66,1712.28 U1.1
  Bottom Layer w10: R6.2 1376.42,1715.98 1420.43,1760 v1(1475,1760)
NetC7_1: C7.1 U3.10 Y1.2 | length 415.9
  Bottom Layer w10: C7.1 1365,560 1336.73,531.73 Y1.2 1336.73,391.26 1409.67,318.33 U3.10
NetC8_2: C8.2 U3.9 Y1.1 | length 388.4
  Bottom Layer w10: Y1.1 1338.51,25 1420,25 1506.97,111.97 U3.9
NetR2_2: R2.2 R4.1 U4.15 | length 320
  Top Layer w10: v1(140,1700) 140,1645.59 179.57,1606.02 U4.15
  Bottom Layer w10: v1(140,1700) 140,1665 154.02,1650.98 R4.1 177.6,1576.18 R2.2
NetR9_1: R9.1 R10.1 U2.15 | length 210
  Top Layer w10: U2.15 1417.2,1617.2 v1(1420,1620)
  Bottom Layer w10: v1(1420,1620) 1466.61,1620 R10.1 R9.1
PSW1: CAM1.3 SW1.1 | length 483.3
  Top Layer w10: v1(15,1315) 18.82,1318.82 CAM1.3
  Bottom Layer w10: v1(15,1315) 7,1315 -18,1290 -18,1198.16 110,1070.16 110,1070 130,1050 SW1.1
PSW2: CAM1.4 SW2.1 | length 350
  Top Layer w10: v1(14.83,1265.17) 19.26,1269.61 CAM1.4
  Bottom Layer w10: v1@11.35,1261.35 0,1250 0,1210 60,1150 SW2.1
PWM5: CAM1.5 PWM.1 R4.2 | length 1789.8
  Top Layer w10: v1(150,1500) 91.3,1500 -20,1388.7 -20,1250 9.61,1220.39 CAM1.5 130.39,1220.39 148,1238 148,1373 175,1400 950,1400 PWM.1
  Bottom Layer w10: v1(150,1500) 210,1500 252.4,1542.4 R4.2
RTS: RTS.1 U3.13 | length 814.6
  Top Layer w10: RTS.1 1550,50 v1(1610,110)
  Bottom Layer w10: U3.13 1591.67,393.33 1615,370 1615,115 v1(1610,110)
RX: U3.14 UART.3 | length 696.3
  Bottom Layer w10: U3.14@1511.09,422.45 U3.14 1583.33,418.33 1616.33,451.33 1616.33,556.24 1537,635.58 1537,636.37 1527,646.37 1527,867 1560.39,900.39 UART.3
RXD0: RX0.1 UART_1.6 | length 718.5
  Top Layer w10: RX0.1 1260.14,950 1317.62,1007.47 1396.53,1086.38 1396.53,1247.9 1571.66,1423.03 UART_1.6
SCK_0: SCK.1 SPI_1.7 U3.3 | length 867
  Top Layer w10: SCK.1 1426.3,450 1579.33,603.03 SPI_1.7 ; SPI_1.7@1647.28,603.86 1741.3,603.86 1789.33,555.83 v1(1789.33,420.83)
  Bottom Layer w10: U3.3 1786.83,418.33 v1(1789.33,420.83)
SERVO1: S1.1 U4.3 | length 329.5
  Top Layer w10: S1.1 230,1450 411.61,1631.61 U4.3
SERVO2: S2.1 U4.2 | length 242.3
  Top Layer w10: S2.1 300,1490 416.02,1606.02 U4.2
SERVO3: S3.1 U4.4 | length 342.4
  Top Layer w10: v1(342.8,1657.2) U4.4
  Bottom Layer w10: v1(342.8,1657.2) 362.8,1637.2 362.8,1487.2 S3.1
SERVO4: S4.1 U4.7 | length 430.6
  Top Layer w10: v1(363.98,1733.98) U4.7
  Bottom Layer w10: v1(363.98,1733.98) 500,1597.95 S4.1
SERVO5: S5.1 U4.10 | length 567.9
  Top Layer w10: U4.10 296.02,1733.98 v1(310,1720)
  Bottom Layer w10: v1(310,1720) 310.4,1720 352.38,1761.98 375.57,1761.98 600,1537.55 S5.1
SERVO6: S6.1 U4.1 | length 299.8
  Top Layer w10: U4.1 569.57,1580.43 S6.1
SERVO7: S7.1 U4.5 | length 442.2
  Top Layer w10: U4.5 507.2,1682.8 690,1500 750,1500 S7.1
SERVO8: S8.1 U4.6 | length 552.8
  Top Layer w10: U4.6 511.61,1708.39 700,1520 830,1520 S8.1
SSEL_0: R11.1 SPI_1.4 SSEL.1 U3.4 | length 868.3
  Top Layer w10: SSEL.1 1273.94,150 1482.8,358.86 ; R11.1 1498.33,343.33 1482.8,358.86 ; SPI_1.4 1579.33,455.39 1482.8,358.86 ; SPI_1.4@1647.28,456.22 1708.94,456.22 v1(1789.33,375.83)
  Bottom Layer w10: U3.4 1771.83,393.33 v1(1789.33,375.83)
TX: U3.15 UART.2 | length 703.2
  Bottom Layer w10: U3.15@1508.87,445.23 U3.15 1582.87,443.33 1598.33,458.79 1598.33,548.79 1519,628.12 1519,628.91 1509,638.91 1509,874.46 1584.15,949.61 UART.2
TXD0: TX0.1 UART_1.5 | length 748
  Top Layer w10: TX0.1 1224.53,874.53 1224.53,888.93 1325.07,989.47 1414.53,1078.93 1414.53,1240.44 1547.91,1373.82 UART_1.5
pads on no net: "CAM1. " "SPI_1. " "UART. " "UART_1. " CAM1. SPI_1. U2.17 U3.5 U3.12 U4.9 U4.11 U4.12 UART. UART_1.

## Polygon pours and split planes (outlines as drawn)
AGND on Top Layer "Top_AGND" (solid, pour order 1000): 1550,1800 1625,1725 1625,1550 1525,1450 1100,1450 1025,1525 875,1525 850,1550 850,1775 875,1800
+3V3 on MidLayer1 "+3V3" (solid, pour order 1001): 230,880 230,620 70,620 70,840.43 70,880
+5V on MidLayer1 "+5V" (solid, pour order 1002): 230,580 70,580 70,320 230,320 230,580
GND on MidLayer2 "GND" (solid, pour order 1003): -33.77,1844 1741.55,1844 1766.91,1844 1843,1767.88 1843,-33.73 1756.77,-120 -13.48,-120 -120,-13.43 -120,1757.73 -33.77,1844

## Silkscreen, mask and mechanical layers (free items; w line width, h text height)
Top Overlay:
  circle w10: c1724.41,0 r59.06
  circle w10: c1724.41,1724.41 r59.06
  circle w10: c0,0 r59.06
  circle w10: c0,1724.41 r59.06
  lines w10: -100,300 250,300 ; -100,600 250,600 ; -100,900 250,900 ; 250,-75 250,1200 1150,1200 1150,-75
  text "+3V3" at -100,830 h40
  text "+5V" at -100,530 h40
  text "GND" at -100,230 h40
Bottom Overlay:
  text "Quadrotor Expansion" at -30,870 h40 r90
  text "2009/06" at 30,345 h32 r90
Mechanical 1:
  lines w10: 0,-122.05 cw(c0,0) -122.05,0 -122.05,1724.41 cw(c0,1724.41) 0,1846.46 ; 0.08,-121.97 1724.41,-121.97 ; 0.08,1846.54 1724.41,1846.54 ; 1724.41,1846.46 cw(c1724.41,1724.41) 1846.46,1724.41 ; 1724.49,-122.2 ccw(c1724.41,-0.08) 1846.54,0 1846.54,1724.33

## Text inside footprints (layer, text, board x,y; h text height)
CAM1: Top Overlay "1" at 63.35,1463.5 h39.37 r270; Top Overlay "7" at 63.35,1090.47 h39.37 r270
SPI_1: Top Overlay "1" at 1646.65,261.5 h39.37 r90; Top Overlay "8" at 1646.65,683.74 h39.37 r90
UART: Bottom Overlay "1" at 1648.62,1047.05 h39.37 r90; Bottom Overlay "4" at 1648.62,821.65 h39.37 r90
UART_1: Top Overlay "6" at 1646.65,1454.53 h39.37 r90; Top Overlay "1" at 1646.65,1130.71 h39.37 r90